# Altium PCB ICAN-7006-USB.PcbDoc
Units mm, origin at the board's own origin, x right, y up, seen from the top; angles counter-clockwise.
Board outline 150 x 80 mm, 2 copper layers (Top Layer, Bottom Layer); 99 components, 160 nets, 498 pads, 0 vias.
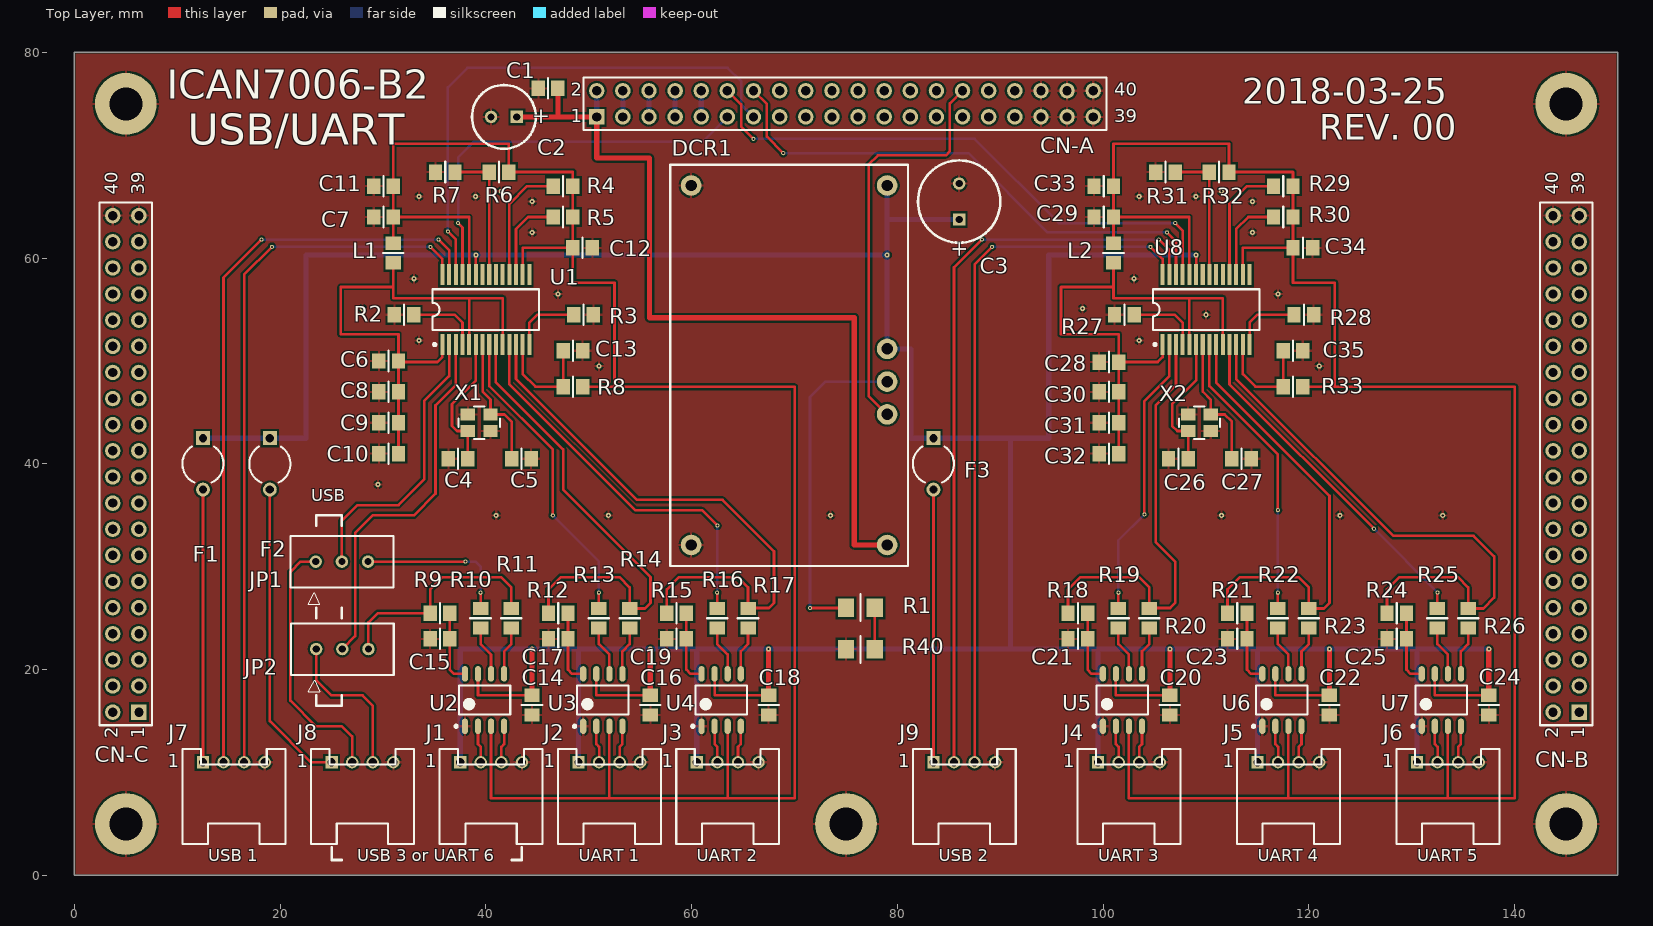
[diagram p0: Top Layer view]
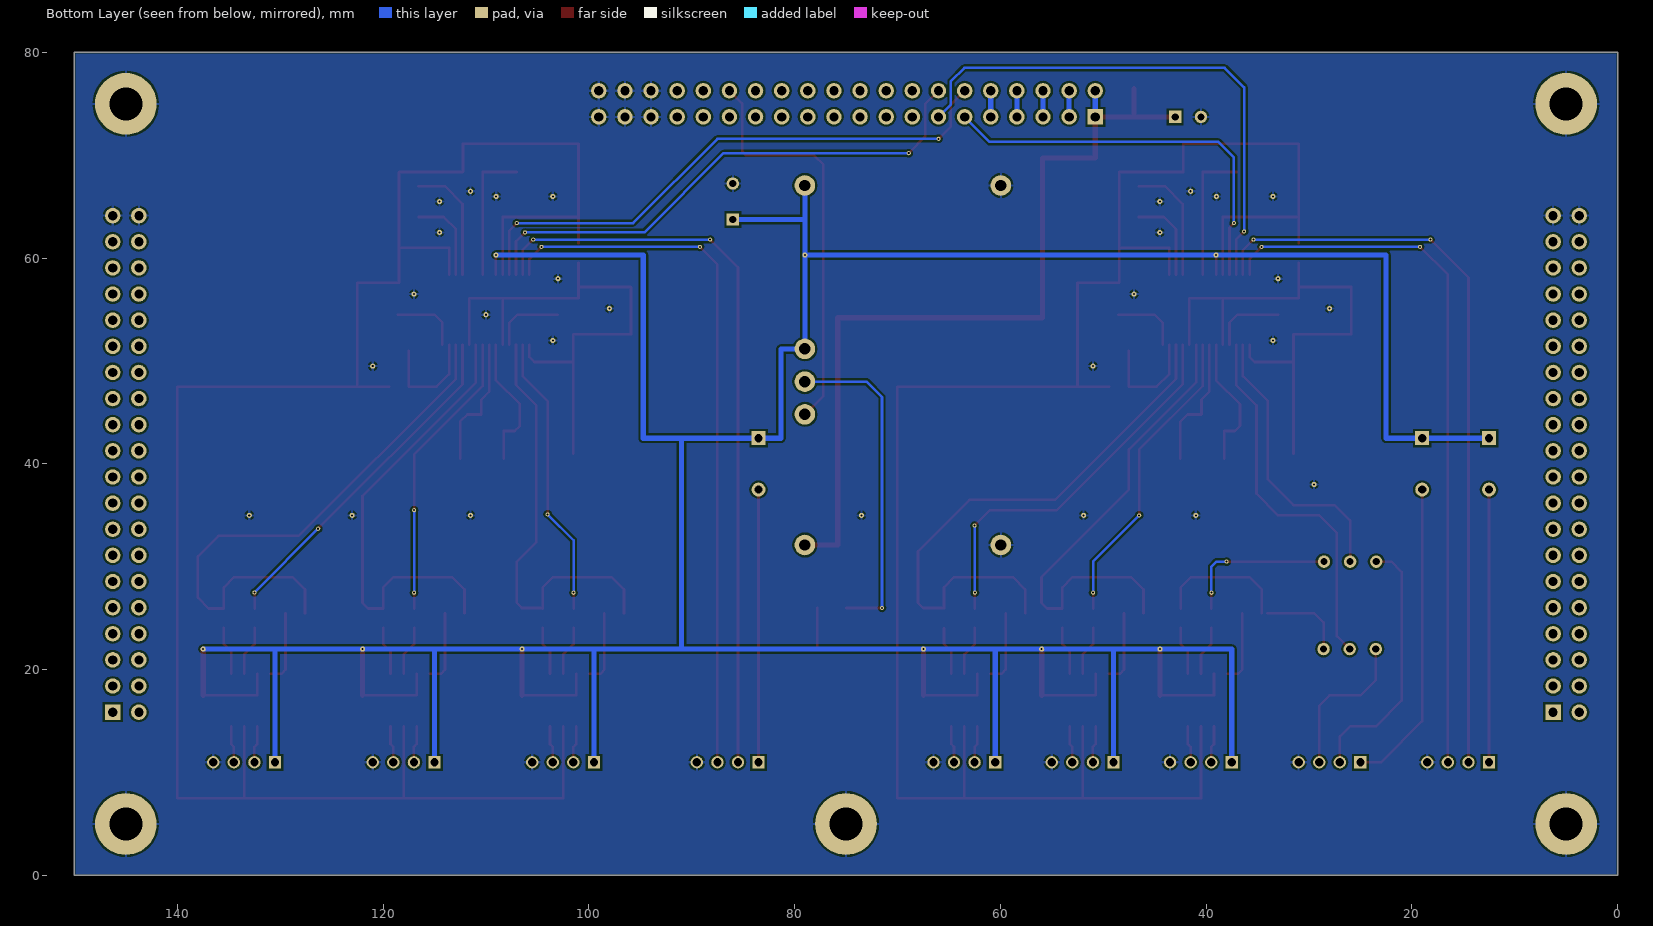
[diagram p1: Bottom Layer view, seen from below]

## Layer stack, top to bottom
Top Layer: signal copper 0.0356
Dielectric: dielectric 0.32, FR-4, Dk 4.8
Bottom Layer: signal copper 0.0356

## Board outline
0,0 0,80 150,80 150,0

## Design rules (kind name [scope] priority, off if disabled: settings)
Clearance [All] p1: gap=0.2
ComponentClearance [All] p1: gap=0.254 collisioncheckmode=3 verticalgap=0.254
HoleSize [All] p1: absolutevalues=TRUE maxlimit=8 minlimit=0.025 maxpercent=80.000 minpercent=20.000
PolygonConnect [All] p1: connectstyle=Relief reliefconductorwidth=0.254 reliefentries=4 polygonreliefangle="90 Angle"
RoutingVias [All] p1: holewidth=0.2 width=0.4 viastyle="Through Hole" minholewidth=0.2 minwidth=0.4 maxholewidth=4 maxwidth=8
SolderMaskExpansion [All] p1: expansion=0.102
TestPointUsage [All] p1: valid=0 allowmultiple=FALSE
Testpoint [All] p1: side=15 testpointundercomponent=TRUE minsize=1.016 maxsize=2.54 preferedsize=1.524 minholesize=0 maxholesize=1.016 preferedholesize=0.813 testpointgrid=0.025 style=1023 order=0123456789
Width [All] p1: maxlimit=2 minlimit=0.2 preferedwidth=0.254
17 further rules are at their usual default settings.

## Components (designator, comment, footprint, x,y, rotation, side; value= is the part's Value field where it differs from the comment)
C1 "100nF" [0805]2012 46.05,76.5 r0 top
C2 "47uF/25V" "Capa MH5 PITCH2.5mm" 41.75,73.73 r180 top
C3 "330uF/16V" "CAPA WXA PITCH 3.5mm" 86,65.5 r90 top
C4 "33pF" [0805]2012 37.3,40.5 r0 top
C5 "33pF" [0805]2012 43.45,40.5 r180 top
C6 "0.1uF" [0805]2012 30.55,50 r0 top
C7 "10uF/10V" [0805]2012 30.05,64 r180 top
C8 "1uF" [0805]2012 30.55,47 r0 top
C9 "33pF" [0805]2012 30.55,44 r0 top
C10 "33pF" [0805]2012 30.55,41 r0 top
C11 "0.1uF" [0805]2012 30.05,67 r0 top
C12 "10uF" [0805]2012 49.4,61 r180 top
C13 "1uF" [0805]2012 48.45,51 r180 top
C14 "0.1uF" [0805]2012 44.48,16.55 r270 top
C15 "0.1uF" [0805]2012 35.53,23 r180 top
C16 "0.1uF" [0805]2012 55.98,16.55 r270 top
C17 "0.1uF" [0805]2012 47.03,23 r180 top
C18 "0.1uF" [0805]2012 67.48,16.55 r270 top
C19 "0.1uF" [0805]2012 58.53,23 r180 top
C20 "0.1uF" [0805]2012 106.48,16.55 r270 top
C21 "0.1uF" [0805]2012 97.53,23 r180 top
C22 "0.1uF" [0805]2012 121.98,16.55 r270 top
C23 "0.1uF" [0805]2012 113.03,23 r180 top
C24 "0.1uF" [0805]2012 137.48,16.55 r270 top
C25 "0.1uF" [0805]2012 128.53,23 r180 top
C26 "33pF" [0805]2012 107.3,40.5 r0 top
C27 "33pF" [0805]2012 113.45,40.5 r180 top
C28 "0.1uF" [0805]2012 100.55,49.9 r0 top
C29 "10uF/10V" [0805]2012 100.05,64 r180 top
C30 "1uF" [0805]2012 100.55,47 r0 top
C31 "33pF" [0805]2012 100.55,44 r0 top
C32 "33pF" [0805]2012 100.55,41 r0 top
C33 "0.1uF" [0805]2012 100.05,67 r0 top
C34 "10uF" [0805]2012 119.4,61 r180 top
C35 "1uF" [0805]2012 118.45,51 r180 top
CN-A "25-1201-220" HDR2X20 50.77,73.73 r0 top locked
CN-B "25-1201-220" HDR2X20 146.27,15.87 r90 top locked
CN-C "25-1201-220" HDR2X20 6.27,15.87 r90 top locked
DCR1 "PTN78020W" PTN78020 59.95,32.12 r90 top
F1 "72V/300mA" CAPR5-4X5 12.5,40 r270 top
F2 "72V/300mA" CAPR5-4X5 19,40 r270 top
F3 "72V/300mA" CAPR5-4X5 83.5,40 r270 top
J1 "HY 4P" HY-4AW 40.5,11 r0 top
J2 "HY 4P" HY-4AW 52,11 r0 top
J3 "HY 4P" HY-4AW 63.5,11 r0 top
J4 "HY 4P" HY-4AW 102.5,11 r0 top
J5 "HY 4P" HY-4AW 118,11 r0 top
J6 "HY 4P" HY-4AW 133.5,11 r0 top
J7 "HY 4P" HY-4AW 15.5,11 r0 top
J8 "HY 4P" HY-4AW 28,11 r0 top
J9 "HY 4P" HY-4AW 86.5,11 r0 top
JP1 "SW Jumper" VR 26,30.5 r90 top
JP2 "SW Jumper" VR 26.04,22 r90 top
L1 "2.2uH/500mA" [0805]2012 31,60.5 r90 top
L2 "2.2uH/500mA" [0805]2012 101,60.5 r90 top
R1 "20k,1/4W" [1206]3216 76.4,26 r180 top
R2 "680,1/8W" [0805]2012 32.05,54.5 r0 top
R3 "10k,1/8W" [0805]2012 49.5,54.5 r180 top
R4 "100k,1/8W" [0805]2012 47.5,67 r180 top
R5 "4.7k,1/8W" [0805]2012 47.5,64 r180 top
R6 "10k,1/8W" [0805]2012 41.275,68.369 r0 top
R7 "47k,1/8W" [0805]2012 36.05,68.369 r0 top
R8 "10k,1/8W" [0805]2012 48.45,47.5 r0 top
R9 "1.5k,1/8W" [0805]2012 35.53,25.5 r0 top
R10 "33,1/8W" [0805]2012 39.48,25 r270 top
R11 "33,1/8W" [0805]2012 42.48,25 r270 top
R12 "1.5k,1/8W" [0805]2012 47.03,25.5 r0 top
R13 "33,1/8W" [0805]2012 50.98,25 r270 top
R14 "33,1/8W" [0805]2012 53.98,25 r270 top
R15 "1.5k,1/8W" [0805]2012 58.53,25.5 r0 top
R16 "33,1/8W" [0805]2012 62.48,25 r270 top
R17 "33,1/8W" [0805]2012 65.48,25 r270 top
R18 "1.5k,1/8W" [0805]2012 97.53,25.5 r0 top
R19 "33,1/8W" [0805]2012 101.48,25 r270 top
R20 "33,1/8W" [0805]2012 104.48,25 r270 top
R21 "1.5k,1/8W" [0805]2012 113.03,25.5 r0 top
R22 "33,1/8W" [0805]2012 116.98,25 r270 top
R23 "33,1/8W" [0805]2012 119.98,25 r270 top
R24 "1.5k,1/8W" [0805]2012 128.53,25.5 r0 top
R25 "33,1/8W" [0805]2012 132.48,25 r270 top
R26 "33,1/8W" [0805]2012 135.48,25 r270 top
R27 "680,1/8W" [0805]2012 102.05,54.5 r0 top
R28 "10k,1/8W" [0805]2012 119.5,54.5 r180 top
R29 "100k,1/8W" [0805]2012 117.5,67 r180 top
R30 "4.7k,1/8W" [0805]2012 117.5,64 r180 top
R31 "47k,1/8W" [0805]2012 106.05,68.369 r0 top
R32 "10k,1/8W" [0805]2012 111.275,68.369 r0 top
R33 "10k,1/8W" [0805]2012 118.45,47.5 r0 top
R40 "1k,1/4W" [1206]3216 76.4,22 r0 top
U1 "GL850G-SSOP28" SSOP-28 40,55 r0 top
U2 "PL2303SA" SOIC150-8_L 39.865,17.05 r90 top
U3 "PL2303SA" SOIC150-8_L 51.365,17.05 r90 top
U4 "PL2303SA" SOIC150-8_L 62.865,17.05 r90 top
U5 "PL2303SA" SOIC150-8_L 101.865,17.05 r90 top
U6 "PL2303SA" SOIC150-8_L 117.365,17.05 r90 top
U7 "PL2303SA" SOIC150-8_L 132.865,17.05 r90 top
U8 "GL850G-SSOP28" SSOP-28 110,55 r0 top
X1 "TSX3225" "XTAL 3225" 39.35,44 r0 top
X2 "TSX3225" "XTAL 3225" 109.35,44 r0 top

## Footprints (in the part's own frame and the unit in brackets; to place one, negate y for a bottom-side part, rotate by r counter-clockwise, add the part's x,y. Pads: shape width x height; smd on the part's side, far side on the other; paste and mask are expansions set on the pad)
[0805]2012 [mm] "SMD 2.0x1.25"
  rect 1.3x1.5 smd: 1(-0.95,0) 2(0.95,0)
  silkscreen extent 0,-1 0,1
[1206]3216 [mm] "SMD 3.2x1.6"
  rect 1.6x1.8 smd: 1(-1.4,0) 2(1.4,0)
  silkscreen extent 0,-1.35 0,1.25
"Capa MH5 PITCH2.5mm" [mm] "Capacitor, Electrolytic, Radial; Body 6.3 mm (Dia.xH typ); Pin Spacing 2.5 mm (typ)"
  rect 1.2x1.2 hole 0.7: 1(-1.25,0)
  round 1.2 hole 0.7: 2(1.25,0)
  silkscreen extent -3.1,-3.1 3.1,3.1
"CAPA WXA PITCH 3.5mm" [mm] "Capacitor, Electrolytic, Radial; Body 8 mm (Dia); Pin Spacing 3.5 mm (typ)"
  rect 1.2x1.2 hole 0.7: 1(-1.75,0)
  round 1.2 hole 0.7: 2(1.75,0)
  silkscreen extent -4,-4 4,4
CAPR5-4X5 [mm] "Capacitor; 2 Leads"
  rect 1.35x1.35 hole 0.8: 1(-2.5,0)
  round 1.35 hole 0.8: 2(2.5,0)
  silkscreen extent -1.69,-2 1.82,2
HDR2X20 [mm] "Connector; Header; 20x2 Position"
  rect 1.5x1.5 hole 0.9: 1(0,0)
  round 1.5 hole 0.9: 2(0,2.54) 3(2.54,0) 4(2.54,2.54) 5(5.08,0) 6(5.08,2.54) 7(7.62,0) 8(7.62,2.54) 9(10.16,0) 10(10.16,2.54) 11(12.7,0) 12(12.7,2.54) 13(15.24,0) 14(15.24,2.54) 15(17.78,0) 16(17.78,2.54) 17(20.32,0) 18(20.32,2.54) 19(22.86,0) 20(22.86,2.54) 21(25.4,0) 22(25.4,2.54) 23(27.94,0) 24(27.94,2.54) 25(30.48,0) 26(30.48,2.54) 27(33.02,0) 28(33.02,2.54) 29(35.56,0) 30(35.56,2.54) 31(38.1,0) 32(38.1,2.54) 33(40.64,0) 34(40.64,2.54) 35(43.18,0) 36(43.18,2.54) 37(45.72,0) 38(45.72,2.54) 39(48.26,0) 40(48.26,2.54)
  silkscreen extent -1.27,-1.27 49.53,3.81
HY-4AW [mm] "YOLINK PHB CONNECTOR A2006-xxA 2.00mm"
  rect 1.2x1.2 hole 0.8: 1(-3,0)
  round 1.2 hole 0.8: 2(-1,0) 3(1,0) 4(3,0)
  silkscreen extent -5,-7.95 5,1.3
PTN78020 [mm] "REGURATOR Ti PTN78020W"
  round 2 hole 1.1: 1(0,0) 2(0,-19.05) 3(12.7,-19.05) 4(15.88,-19.05) 5(19.06,-19.05) 6(34.94,-19.05) 7(34.94,0)
  silkscreen extent -2.03,-21.08 36.96,2.03
SOIC150-8_L [mm] "8-Pin Plastic Narrow Body Small Outline Integrated Circuit 1.27 mm Pitch, IPC High Density"
  oval 1.5x0.6 smd: 1(-2.55,1.905) 2(-2.55,0.635) 3(-2.55,-0.635) 4(-2.55,-1.905) 5(2.55,-1.905) 6(2.55,-0.635) 7(2.55,0.635) 8(2.55,1.905)
  silkscreen extent -2.67,-2.5 1.4,2.88, body extent -2,-2.5 2,2.5, height 1.76
SSOP-28 [mm] "SSOP, Plastic; 28 Leads; Body Width 5.2 mm; Pitch 0.65 mm"
  rect 0.4x2.05 smd: 1(-4.225,-3.4) 2(-3.575,-3.4) 3(-2.925,-3.4) 4(-2.275,-3.4) 5(-1.625,-3.4) 6(-0.975,-3.4) 7(-0.325,-3.4) 8(0.325,-3.4) 9(0.975,-3.4) 10(1.625,-3.4) 11(2.275,-3.4) 12(2.925,-3.4) 13(3.575,-3.4) 14(4.225,-3.4) 15(4.225,3.4) 16(3.575,3.4) 17(2.925,3.4) 18(2.275,3.4) 19(1.625,3.4) 20(0.975,3.4) 21(0.325,3.4) 22(-0.325,3.4) 23(-0.975,3.4) 24(-1.625,3.4) 25(-2.275,3.4) 26(-2.925,3.4) 27(-3.575,3.4) 28(-4.225,3.4)
  silkscreen extent -5.18,-3.52 5.17,1.98
VR [mm] "VR Trim"
  round 1.2 hole 0.7: 1(0,2.54) 2(0,0) 3(0,-2.54)
  silkscreen extent -4.15,-5 2.5,5
"XTAL 3225" [mm]
  rect 1.4x1.15 smd: 1(-1.1,-0.8) 2(1.1,-0.8) 3(1.1,0.8) 4(-1.1,0.8)
  silkscreen extent -2,-1.6 2,1.6

## Part data
C1: library part Cap, "Capacitor"
C2 C3: library part "Cap Pol2", "Polarized Capacitor (Axial)"
C4 C5 C6 C8 C9 C10 C11 C12 C13 C14 C15 C16 C17 C18 C19 C20 C21 C22 C23 C24 C25 C26 C27 C28 C30 C31 C32 C33 C34 C35: library part "Cap Semi", "Capacitor (Semiconductor SIM Model)"
C7 C29: library part "Cap Pol3", "Polarized Capacitor (Surface Mount)"
CN-A CN-B: library part "Header 25X2", "Header, 25-Pin, Dual row"
CN-C: library part "Header 20X2", "Header, 20-Pin, Dual row"
DCR1: library part PTN78020
F1 F2 F3: library part "Fuse 1", "Fuse"
J1 J2 J3 J4 J5 J6 J7 J8 J9: library part "Header 4", "Header, 4-Pin"
L1 L2: library part Inductor, "Inductor"
R1 R2 R3 R4 R5 R6 R7 R8 R9 R10 R11 R12 R13 R14 R15 R16 R17 R18 R19 R20 R21 R22 R23 R24 R25 R26 R27 R28 R29 R30 R31 R32 R33 R40: library part Res1, "Resistor"
U1 U7 U8: library part IC28
U2: library part "IC48 QFP"
U3 U4 U5 U6: library part IC8-WIDE
X1 X2: library part "IC4 WIDE"

## Free pads (board coordinates)
  round 6 hole 3.2: 0(5,5) 0(5,75) 0(75,5) 0(145,5) 0(145,75)
  round 0.4 hole 0.2: 0(18.2,61.8) 0(19.2,61.1) 0(34.6,61.1) 0(35.4,61.8) 0(36.3,62.6) 0(37.3,63.4) 0(38,30.5) 0(39.48,27.48) 0(46.5,35) 0(50.98,27.48) 0(62.48,27.48) 0(62.5,34) 0(66,71.6) 0(68.9,70.2) 0(71.5,26) 0(88.2,61.8) 0(89.2,61.1) 0(101.48,27.48) 0(104,35.1) 0(104.6,61.1) 0(105.4,61.8) 0(106.2,62.5) 0(107,63.4) 0(116.98,27.48) 0(116.98,35.5) 0(126.3,33.7) 0(132.5,27.5)
  round 0.5 hole 0.2: 0(28,55.1) 0(29.5,38) 0(33,58) 0(33.5,52) 0(33.5,66) 0(39,66) 0(39.025,60.3) 0(41,35) 0(41.5,66.5) 0(44.48,22) 0(44.5,62.5) 0(44.5,65.5) 0(47,56.5) 0(51,49.5) 0(51.9,35) 0(55.98,22) 0(67.48,22) 0(73.5,35) 0(79,60.3) 0(98,55.1) 0(103,58) 0(103.5,52) 0(103.5,66) 0(106.48,22) 0(109,66) 0(109.025,60.3) 0(110,54.5) 0(111.5,35) 0(111.5,66.5) 0(114.5,62.5) 0(114.5,65.5) 0(117,56.5) 0(121,49.5) 0(121.98,22) 0(123,35) 0(133,35) 0(137.48,22)

## Nets (pads, with @x,y where several pads share a name; then routed paths per layer and width w, separated by ;. In a path a pad name is that pad's centre, name@x,y a point inside that pad or via, vN(x,y) a via of type N, cw(c..) or ccw(c..) an arc to the next point about the centre after c; other vN are vias at no path point)
*LIGHT_ON: CN-A.33
*MF-DIR: CN-B.3
*MF-ENB: CN-B.5
*ML-ALM: CN-C.8
*ML-BRAKE: CN-B.10
*ML-ENB: CN-B.12
*ML-F/*R: CN-B.8
*ML-PG: CN-C.6
*MLL-PG_B: CN-C.12
*MLL-PG_F: CN-C.10
*MLR-PG_B: CN-C.11
*MLR-PG_F: CN-C.9
*MOTOR_ON1: CN-A.29
*MOTOR_ON2: CN-A.31
*MR-ALM: CN-C.7
*MR-BRAKE: CN-B.9
*MR-ENB: CN-B.11
*MR-F/*R: CN-B.7
*MR-PG: CN-C.5
*SNS-COVER: CN-C.19
*SNS-HOME_C: CN-C.3
*SNS-HOME_L: CN-C.2
*SNS-HOME_R: CN-C.1
*SNS-MIC_CLOSE: CN-C.4
*SNS-RAIN: CN-C.30
*SW-A/*M: CN-C.28
*SW-BRAKE: CN-C.27
*SW-EMERGENCY: CN-A.25
*SW-LUG-B_OR: CN-C.24
*SW-LUG-B_POS: CN-C.22
*SW-LUG-CENTER: CN-C.20
*SW-LUG-F_OR: CN-C.23
*SW-LUG-F_POS: CN-C.21
*SW-LUG_DN: CN-C.34
*SW-LUG_UP: CN-C.32
*SW-MLL_CLOSE: CN-C.16
*SW-MLL_OPEN: CN-C.18
*SW-MLR_CLOSE: CN-C.15
*SW-MLR_OPEN: CN-C.17
*SW-SEAT: CN-C.29
*SW_CLOSE: CN-C.26
*SW_FORWORD: CN-C.31
*SW_OPEN: CN-C.25
AD-48V: CN-C.13
AD-ACC: CN-C.14
AD-TEMP: CN-C.33
DC3.3V: CN-A.7 CN-A.8 | length 2.5
  Bottom Layer w0.5: CN-A.7 CN-A.8
DC5V: CN-A.5 CN-A.6 | length 2.5
  Bottom Layer w0.5: CN-A.5 CN-A.6
DC5VB: C3.1 C14.1 C16.1 C18.1 C20.1 C22.1 C24.1 DCR1.5 DCR1.6 F1.1 F2.1 F3.1 J1.1 J2.1 J3.1 J4.1 J5.1 J6.1 pad.0@39.025,60.3 pad.0@44.48,22 pad.0@55.98,22 pad.0@67.48,22 pad.0@79,60.3 pad.0@106.48,22 pad.0@109.025,60.3 pad.0@121.98,22 pad.0@137.48,22 U1.23 U2.7 U3.7 U4.7 U5.7 U6.7 U7.7 U8.23 | length 425.1
  Top Layer w0.254: U1.23 pad.0@39.025,60.3 ; U2.7 39.23,17.5 C14.1 ; U3.7 50.73,17.5 C16.1 ; U4.7 62.23,17.5 C18.1 ; U5.7 101.23,17.5 C20.1 ; U8.23 pad.0@109.025,60.3 ; U6.7 116.73,17.5 C22.1 ; U7.7 132.23,17.5 C24.1
  Top Layer w0.5: C14.1 pad.0@44.48,22 ; C16.1 pad.0@55.98,22 ; C18.1 pad.0@67.48,22 ; C20.1 pad.0@106.48,22 ; C22.1 pad.0@121.98,22 ; C24.1 pad.0@137.48,22
  Bottom Layer w0.5: F1.1 22.5,42.5 22.5,60.3 pad.0@79,60.3 ; J1.1 37.5,22 pad.0@137.48,22 ; J2.1 49,22 ; J3.1 60.5,22 ; 79,63.75 C3.1 ; DCR1.6 DCR1.5 81.32,51.18 81.32,42.5 94.7,42.5 94.7,60.3 pad.0@109.025,60.3 ; 91,22 91,42.5 ; J4.1 99.5,22 ; J5.1 115,22 ; J6.1 130.5,22
DC12V: CN-A.3 CN-A.4 | length 2.5
  Bottom Layer w0.5: CN-A.3 CN-A.4
DC24V: C1.2 C2.1 CN-A.1 CN-A.2 DCR1.2 | length 82.9
  Top Layer w0.5: C2.1 CN-A.1 50.77,69.73 55.9,69.73 55.9,54.2 75.8,54.2 75.8,32.12 DCR1.2 ; 47,73.73 C1.2
  Bottom Layer w0.5: CN-A.1 CN-A.2
DM11: J7.2 pad.0@18.2,61.8 pad.0@35.4,61.8 U1.27 | length 73.4
  Top Layer w0.254: J7.2 14.5,58.1 pad.0@18.2,61.8 ; pad.0@35.4,61.8 36.425,60.775 U1.27
  Bottom Layer w0.254: pad.0@18.2,61.8 pad.0@35.4,61.8
DM12: JP1.2 U1.2 | length 27.8
  Top Layer w0.254: JP1.2 26,34.5 27.5,36 31.5,36 34,38.5 34,46.1 36.425,48.525 U1.2
DM12-1: J8.2 JP1.1 | length 25.3
  Top Layer w0.254: JP1.1 22,30.5 21,29.5 21,17 23.5,14.5 26,14.5 27,13.5 J8.2
DM12-2: JP1.3 pad.0@38,30.5 pad.0@39.48,27.48 R10.1 | length 15.2
  Top Layer w0.254: JP1.3 pad.0@38,30.5 ; R10.1 pad.0@39.48,27.48
  Bottom Layer w0.254: pad.0@38,30.5 39,30.5 39.48,30.02 pad.0@39.48,27.48
DM13: pad.0@46.5,35 pad.0@50.98,27.48 R13.1 U1.8 | length 30.1
  Top Layer w0.254: U1.8 40.325,47.575 46.5,41.4 pad.0@46.5,35 ; R13.1 pad.0@50.98,27.48
  Bottom Layer w0.254: pad.0@46.5,35 50.98,30.52 pad.0@50.98,27.48
DM14: pad.0@62.5,34 pad.0@62.48,27.48 R16.1 U1.11 | length 39.9
  Top Layer w0.254: U1.11 42.275,47.725 54.5,35.5 61,35.5 pad.0@62.5,34 ; R16.1 pad.0@62.48,27.48
  Bottom Layer w0.254: pad.0@62.48,27.48 62.48,29.52 ; pad.0@62.5,27.48 pad.0@62.5,34
DM21: J9.2 pad.0@88.2,61.8 pad.0@105.4,61.8 U8.27 | length 72.9
  Top Layer w0.254: J9.2 85.5,59.1 pad.0@88.2,61.8 ; pad.0@105.4,61.8 106.425,60.775 U8.27
  Bottom Layer w0.254: pad.0@88.2,61.8 pad.0@105.4,61.8
DM22: pad.0@101.48,27.48 pad.0@104,35.1 R19.1 U8.2 | length 27.7
  Top Layer w0.254: R19.1 pad.0@101.48,27.48 ; pad.0@104,35.1 104,46.1 106.425,48.525 U8.2
  Bottom Layer w0.254: pad.0@101.48,27.48 101.48,32.58 pad.0@104,35.1
DM23: pad.0@116.98,27.48 pad.0@116.98,35.5 R22.1 U8.8 | length 28.4
  Top Layer w0.254: U8.8 110.325,47.575 116.98,40.92 pad.0@116.98,35.5 ; R22.1 pad.0@116.98,27.48
  Bottom Layer w0.254: pad.0@116.98,27.48 pad.0@116.98,35.5
DM24: pad.0@126.3,33.7 pad.0@132.5,27.5 R25.1 U8.11 | length 34
  Top Layer w0.254: U8.11 112.275,47.725 pad.0@126.3,33.7 ; R25.1 pad.0@132.48,27.48
  Bottom Layer w0.254: pad.0@126.3,33.7 pad.0@132.5,27.5
DP11: J7.3 pad.0@19.2,61.1 pad.0@34.6,61.1 U1.28 | length 69.8
  Top Layer w0.254: J7.3 16.5,58.4 pad.0@19.2,61.1 ; pad.0@34.6,61.1 35.775,59.925 U1.28
  Bottom Layer w0.254: pad.0@19.2,61.1 pad.0@34.6,61.1
DP12: JP2.2 U1.3 | length 36.5
  Top Layer w0.254: JP2.2 27.3,23.26 27.3,33.3 29,35 33,35 35.1,37.1 35.1,45.7 37.075,47.675 U1.3
DP12-1: J8.3 JP2.1 | length 15
  Top Layer w0.254: JP2.1 23.5,19 25,17.5 28,17.5 29,16.5 J8.3
DP12-2: JP2.3 R9.1 R11.1 | length 21.6
  Top Layer w0.254: JP2.3 28.58,24.58 29.5,25.5 R9.1@34.072,25.5 ; R9.1 34.58,27.8 35.78,29 41.48,29 42.48,28 R11.1
DP13: R12.1 R14.1 U1.9 | length 46.7
  Top Layer w0.254: U1.9 40.975,47.925 47.5,41.4 47.5,37.5 56,29 56,26.5 55.45,25.95 R14.1 53.98,28 52.98,29 47.28,29 46.08,27.8 R12.1
DP14: R15.1 R17.1 U1.12 | length 56.2
  Top Layer w0.254: U1.12 42.925,48.275 54.7,36.5 63,36.5 68,31.5 68,26.5 67.5,26 R17.1@65.48,26 ; R15.1 57.58,27.8 58.78,29 64.48,29 65.48,28 R17.1
DP21: J9.3 pad.0@89.2,61.1 pad.0@104.6,61.1 U8.28 | length 69.4
  Top Layer w0.254: J9.3 87.5,59.4 pad.0@89.2,61.1 ; pad.0@104.6,61.1 105.775,59.925 U8.28
  Bottom Layer w0.254: pad.0@89.2,61.1 pad.0@104.6,61.1
DP22: R18.1 R20.1 U8.3 | length 42.6
  Top Layer w0.254: R18.1 96.58,27.8 97.78,29 103.48,29 104.48,28 R20.1 ; R20.1@104.48,26 106.5,26 107,26.5 107,30.5 105.1,32.4 105.1,45.7 107.075,47.675 U8.3
DP23: R21.1 R23.1 U8.9 | length 45.1
  Top Layer w0.254: U8.9 110.975,47.925 122,36.9 122,26.5 121.45,25.95 R23.1 119.98,28 118.98,29 113.28,29 112.08,27.8 R21.1
DP24: R24.1 R26.1 U8.12 | length 55.7
  Top Layer w0.254: U8.12 112.925,48.275 128.2,33 136,33 138,31 138,27 136.95,25.95 R26.1 135.48,28 134.48,29 128.78,29 127.58,27.8 R24.1
GND: C1.1 C2.2 C3.2 C4.1 C5.1 C6.1 C7.2 C8.1 C9.1 C10.1 C11.1 C12.1 C13.1 C14.2 C15.2 C16.2 C17.2 C18.2 C19.2 C20.2 C21.2 C22.2 C23.2 C24.2 C25.2 C26.1 C27.1 C28.1 C29.2 C30.1 C31.1 C32.1 C33.1 C34.1 C35.1 CN-A.35 CN-A.36 CN-A.37 CN-A.38 CN-A.39 CN-A.40 CN-B.39 CN-B.40 CN-C.39 CN-C.40 DCR1.1 DCR1.7 J1.4 J2.4 J3.4 J4.4 J5.4 J6.4 J7.4 J8.4 J9.4 pad.0@5,5 pad.0@5,75 pad.0@28,55.1 pad.0@29.5,38 pad.0@33,58 pad.0@33.5,52 pad.0@33.5,66 pad.0@39,66 pad.0@41,35 pad.0@41.5,66.5 pad.0@44.5,62.5 pad.0@44.5,65.5 pad.0@47,56.5 pad.0@51,49.5 pad.0@51.9,35 pad.0@73.5,35 pad.0@75,5 pad.0@98,55.1 pad.0@103,58 pad.0@103.5,52 pad.0@103.5,66 pad.0@109,66 pad.0@110,54.5 pad.0@111.5,35 pad.0@111.5,66.5 pad.0@114.5,62.5 pad.0@114.5,65.5 pad.0@117,56.5 pad.0@121,49.5 pad.0@123,35 pad.0@133,35 pad.0@145,5 pad.0@145,75 R2.1 R3.1 R7.1 R27.1 R28.1 R31.1 R40.1 U2.1 U3.1 U4.1 U5.1 U6.1 U7.1 X1.2 X1.4 X2.2 X2.4
HUB_33V1: C7.1 C11.2 C12.2 L1.2 R4.1 R5.1 R6.2 R8.2 U1.16 U1.24 U2.3 U3.3 U4.3 | length 186.3
  Top Layer w0.254: L1.2 31,71.1 42.225,71.1 R6.2 48.45,68.369 48.45,57.6 52.5,57.6 52.5,47.5 ; C7.1 38.375,64 U1.24 ; U2.3 40.5,7.5 70,7.5 70,47.5 R8.2 ; U1.16 43.575,61 C12.2 ; 52,7.5 U3.3 ; 63.5,7.5 U4.3
HUB_33V2: C29.1 C33.2 C34.2 L2.2 R29.1 R30.1 R32.2 R33.2 U5.3 U6.3 U7.3 U8.16 U8.24 | length 194.3
  Top Layer w0.254: L2.2 101,71.1 112.225,71.1 R32.2 118.45,68.369 118.45,57.6 122.5,57.6 122.5,47.5 ; C29.1 108.375,64 U8.24 ; U5.3 102.5,7.5 140,7.5 140,47.5 R33.2 ; U8.16 113.575,61 C34.2 ; 118,7.5 U6.3 ; 133.5,7.5 U7.3
I2C_SCL: CN-A.18
I2C_SCL2: CN-A.20
I2C_SDA: CN-A.17
I2C_SDA2: CN-A.19
LUG-BRAKE: CN-B.23
LUG-PWM1: CN-B.19
LUG-PWM2: CN-B.21
MF-PWM: CN-B.1
MIC-MOTOR: CN-B.25
ML-PWM: CN-B.14
MLL-PWM1: CN-B.16
MLL-PWM2: CN-B.18
MLR-PWM1: CN-B.15
MLR-PWM2: CN-B.17
MR-PWM: CN-B.13
NetC4_2: C4.2 U1.6 X1.1 | length 13.3
  Top Layer w0.254: C4.2 X1.1 37.2,43.2 36.7,43.7 36.7,45.8 39.025,48.125 U1.6
NetC5_2: C5.2 U1.7 X1.3 | length 13.1
  Top Layer w0.254: U1.7 39.675,47.025 40.45,46.25 X1.3 41.8,44.8 42.5,44.1 C5.2
NetC6_2: C6.2 C8.2 C9.2 C10.2 L1.1 U1.1 U1.5 U1.10 | length 55.6
  Top Layer w0.254: 31,57.2 25.9,57.2 25.9,52.6 31.5,52.6 C10.2 ; L1.1 31,56.1 41.625,56.1 U1.10 ; C6.2@31.5,49.9 35.3,49.9 35.775,50.375 U1.1 ; U1.5 38.375,56.075
NetC13_2: C13.2 R8.1 U1.13 | length 10.8
  Top Layer w0.254: U1.13 43.575,48.725 44.8,47.5 R8.1 C13.2
NetC15_1: C15.1 R9.2 U2.8 | length 7.1
  Top Layer w0.254: R9.2 36.48,20 36.88,19.6 U2.8
NetC17_1: C17.1 R12.2 U3.8 | length 7.1
  Top Layer w0.254: R12.2 47.98,20 48.38,19.6 U3.8
NetC19_1: C19.1 R15.2 U4.8 | length 7.1
  Top Layer w0.254: R15.2 59.48,20 59.88,19.6 U4.8
NetC21_1: C21.1 R18.2 U5.8 | length 7.1
  Top Layer w0.254: R18.2 98.48,20 98.88,19.6 U5.8
NetC23_1: C23.1 R21.2 U6.8 | length 7.1
  Top Layer w0.254: R21.2 113.98,20 114.38,19.6 U6.8
NetC25_1: C25.1 R24.2 U7.8 | length 7.1
  Top Layer w0.254: R24.2 129.48,20 129.88,19.6 U7.8
NetC26_2: C26.2 U8.6 X2.1 | length 13.3
  Top Layer w0.254: C26.2 X2.1 107.2,43.2 106.7,43.7 106.7,45.8 109.025,48.125 U8.6
NetC27_2: C27.2 U8.7 X2.3 | length 13.1
  Top Layer w0.254: U8.7 109.675,47.025 110.45,46.25 X2.3 111.8,44.8 112.5,44.1 C27.2
NetC28_2: C28.2 C30.2 C31.2 C32.2 L2.1 U8.1 U8.5 U8.10 | length 55.6
  Top Layer w0.254: 101,57.2 95.9,57.2 95.9,52.6 101.5,52.6 C32.2 ; L2.1 101,56.1 111.625,56.1 U8.10 ; C28.2 105.3,49.9 105.775,50.375 U8.1 ; U8.5 108.375,56.075
NetC35_2: C35.2 R33.1 U8.13 | length 10.8
  Top Layer w0.254: U8.13 113.575,48.725 114.8,47.5 R33.1 C35.2
NetDCR1_4: DCR1.4 pad.0@71.5,26 R1.2 | length 32.1
  Top Layer w0.254: pad.0@71.5,26 R1.2
  Bottom Layer w0.254: pad.0@71.5,26 71.5,46.5 73,48 DCR1.4
NetF1_2: F1.2 J7.1 | length 26.5
  Top Layer w0.254: J7.1 F1.2
NetF2_2: F2.2 J8.1 | length 30.2
  Top Layer w0.254: F2.2 19,15 23,11 J8.1
NetF3_2: F3.2 J9.1 | length 26.5
  Top Layer w0.254: J9.1 F3.2
NetJ1_2: J1.2 U2.2 | length 3.6
  Top Layer w0.254: U2.2 39.23,12.77 39.5,12.5 J1.2
NetJ1_3: J1.3 U2.4 | length 3.6
  Top Layer w0.254: J1.3 41.5,12.5 41.77,12.77 U2.4
NetJ2_2: J2.2 U3.2 | length 3.6
  Top Layer w0.254: U3.2 50.73,12.77 51,12.5 J2.2
NetJ2_3: J2.3 U3.4 | length 3.6
  Top Layer w0.254: J2.3 53,12.5 53.27,12.77 U3.4
NetJ3_2: J3.2 U4.2 | length 3.6
  Top Layer w0.254: U4.2 62.23,12.77 62.5,12.5 J3.2
NetJ3_3: J3.3 U4.4 | length 3.6
  Top Layer w0.254: J3.3 64.5,12.5 64.77,12.77 U4.4
NetJ4_2: J4.2 U5.2 | length 3.6
  Top Layer w0.254: U5.2 101.23,12.77 101.5,12.5 J4.2
NetJ4_3: J4.3 U5.4 | length 3.6
  Top Layer w0.254: J4.3 103.5,12.5 103.77,12.77 U5.4
NetJ5_2: J5.2 U6.2 | length 3.6
  Top Layer w0.254: U6.2 116.73,12.77 117,12.5 J5.2
NetJ5_3: J5.3 U6.4 | length 3.6
  Top Layer w0.254: J5.3 119,12.5 119.27,12.77 U6.4
NetJ6_2: J6.2 U7.2 | length 3.6
  Top Layer w0.254: U7.2 132.23,12.77 132.5,12.5 J6.2
NetJ6_3: J6.3 U7.4 | length 3.6
  Top Layer w0.254: J6.3 134.5,12.5 134.77,12.77 U7.4
NetR1_1: R1.1 R40.2 | length 4
  Top Layer w0.254: R40.2 R1.1
NetR2_2: R2.2 U1.4 | length 7.2
  Top Layer w0.254: R2.2 36.95,54.5 37.725,53.725 U1.4
NetR3_2: R3.2 U1.14 | length 6.8
  Top Layer w0.254: U1.14 44.225,53.725 45,54.5 R3.2
NetR4_2: R4.2 U1.18 | length 11.9
  Top Layer w0.254: U1.18 42.275,65.275 44,67 R4.2
NetR5_2: R5.2 U1.17 | length 8.5
  Top Layer w0.254: U1.17 42.925,62.825 44.1,64 R5.2
NetR6_1: R6.1 R7.2 U1.21 | length 13.3
  Top Layer w0.254: R7.2 R6.1 U1.21
NetR10_2: R10.2 U2.6 | length 4.9
  Top Layer w0.254: R10.2 39.48,22.5 40.5,21.48 U2.6
NetR11_2: R11.2 U2.5 | length 4.7
  Top Layer w0.254: U2.5 41.77,21.79 42.48,22.5 R11.2
NetR13_2: R13.2 U3.6 | length 4.9
  Top Layer w0.254: R13.2 50.98,22.5 52,21.48 U3.6
NetR14_2: R14.2 U3.5 | length 4.7
  Top Layer w0.254: U3.5 53.27,21.79 53.98,22.5 R14.2
NetR16_2: R16.2 U4.6 | length 4.9
  Top Layer w0.254: R16.2 62.48,22.5 63.5,21.48 U4.6
NetR17_2: R17.2 U4.5 | length 4.7
  Top Layer w0.254: U4.5 64.77,21.79 65.48,22.5 R17.2
NetR19_2: R19.2 U5.6 | length 4.9
  Top Layer w0.254: R19.2 101.48,22.5 102.5,21.48 U5.6
NetR20_2: R20.2 U5.5 | length 4.7
  Top Layer w0.254: U5.5 103.77,21.79 104.48,22.5 R20.2
NetR22_2: R22.2 U6.6 | length 4.9
  Top Layer w0.254: R22.2 116.98,22.5 118,21.48 U6.6
NetR23_2: R23.2 U6.5 | length 4.7
  Top Layer w0.254: U6.5 119.27,21.79 119.98,22.5 R23.2
NetR25_2: R25.2 U7.6 | length 4.9
  Top Layer w0.254: R25.2 132.48,22.5 133.5,21.48 U7.6
NetR26_2: R26.2 U7.5 | length 4.7
  Top Layer w0.254: U7.5 134.77,21.79 135.48,22.5 R26.2
NetR27_2: R27.2 U8.4 | length 7.2
  Top Layer w0.254: R27.2 106.95,54.5 107.725,53.725 U8.4
NetR28_2: R28.2 U8.14 | length 6.8
  Top Layer w0.254: U8.14 114.225,53.725 115,54.5 R28.2
NetR29_2: R29.2 U8.18 | length 11.9
  Top Layer w0.254: U8.18 112.275,65.275 114,67 R29.2
NetR30_2: R30.2 U8.17 | length 8.5
  Top Layer w0.254: U8.17 112.925,62.825 114.1,64 R30.2
NetR31_2: R31.2 R32.1 U8.21 | length 13.3
  Top Layer w0.254: R31.2 R32.1 U8.21
PCM-CK: CN-B.35
PCM-DI: CN-B.34
PCM-DO: CN-B.33
PCM-SYNC: CN-B.36
SNS-BRAKE_CURR: CN-C.36
SNS-LUG-CURR: CN-C.37
SNS-MLL_CURR: CN-C.38
SNS-MLR_CURR: CN-C.35
UART-CB_RX: CN-A.22
UART-CB_TX: CN-A.21
US_EMG: CN-A.26
US_POWER: CN-A.32
USB_5V: CN-A.9 CN-A.10 | length 2.5
  Bottom Layer w0.5: CN-A.9 CN-A.10
USB_DM1: CN-A.11 pad.0@37.3,63.4 U1.25 | length 39.4
  Top Layer w0.254: pad.0@37.3,63.4 37.725,62.975 U1.25
  Bottom Layer w0.254: pad.0@37.3,63.4 37.3,69.8 38.8,71.3 61.04,71.3 CN-A.11
USB_DM2: CN-A.12 pad.0@66,71.6 pad.0@107,63.4 U8.25 | length 55.4
  Top Layer w0.254: CN-A.12 64.8,74.94 64.8,72.8 pad.0@66,71.6 ; pad.0@107,63.4 107.725,62.675 U8.25
  Bottom Layer w0.254: pad.0@66,71.6 87.5,71.6 95.7,63.4 pad.0@107,63.4
USB_DP1: CN-A.13 pad.0@36.3,62.6 U1.26 | length 52.3
  Top Layer w0.254: pad.0@36.3,62.6 37.075,61.825 U1.26
  Bottom Layer w0.254: pad.0@36.3,62.6 36.3,76.6 38.2,78.5 63.5,78.5 64.8,77.2 64.8,74.94 CN-A.13
USB_DP2: CN-A.14 pad.0@68.9,70.2 pad.0@106.2,62.5 U8.26 | length 52.2
  Top Layer w0.254: CN-A.14 67.3,74.98 67.3,71.8 pad.0@68.9,70.2 ; pad.0@106.2,62.5 107.075,61.625 U8.26
  Bottom Layer w0.254: pad.0@68.9,70.2 86.9,70.2 94.6,62.5 pad.0@106.2,62.5
USB_POWER: CN-A.30 DCR1.3 | length 39.8
  Top Layer w0.254: DCR1.3 77.2,46.62 77.2,69.1 78.1,70 84.7,70 85.1,70.4 85.1,75.04 CN-A.30
pads on no net: CN-A.15 CN-A.16 CN-A.23 CN-A.24 CN-A.27 CN-A.28 CN-A.34 CN-B.2 CN-B.4 CN-B.6 CN-B.20 CN-B.22 CN-B.24 CN-B.26 CN-B.27 CN-B.28 CN-B.29 CN-B.30 CN-B.31 CN-B.32 CN-B.37 CN-B.38 U1.15 U1.19 U1.20 U1.22 U8.15 U8.19 U8.20 U8.22

## Polygon pours and split planes (outlines as drawn)
GND on Top Layer "Top Layer-No Net" (solid, pour order 1001): 0.127,0.127 149.873,0.127 149.873,79.873 0.127,79.873
GND on Bottom Layer "Bottom Layer-No Net" (solid, pour order 1000): 0.127,0.127 149.873,0.127 149.873,79.873 0.127,79.873

## Silkscreen, mask and mechanical layers (free items; w line width, h text height)
Top Overlay:
  lines w0.254: 23.5,17.5 23.5,16.5 26,16.5 26,17.5 ; 23.5,25 23.5,26 ; 23.5,34 23.5,35 26,35 26,34 ; 25,2.73 25,1.5 26,1.5 ; 26,25 26,26 ; 42.5,1.5 43.5,1.5 43.5,2.73
  text "ICAN7006-B2" at 9,75.5 h2.8
  text "2018-03-25" at 113.5,75 h2.5
  text "REV. 00" at 121,71.5 h2.5
  text "USB/UART" at 11,71 h3
  text "USB" at 23,36 h2
  text "USB 1" at 13,1 h2
  text "USB 3 or UART 6" at 27.5,1 h2
  text "UART 1" at 49,1 h2
  text "UART 2" at 60.5,1 h2
  text "USB 2" at 84,1 h2
  text "UART 3" at 99.5,1 h2
  text "UART 4" at 115,1 h2
  text "UART 5" at 130.5,1 h2
Mechanical 13:
  the board outline again, w0.254

## Text inside footprints (layer, text, board x,y; h text height)
C2: Top Overlay "+" at 46.25,74.43 h1.52 r180
C3: Top Overlay "+" at 86.7,60 h1.52 r90
CN-A: Top Overlay "39" at 101.062,73.222 h1.27; Top Overlay "40" at 101.062,75.762 h1.27; Top Overlay "2" at 48.23,75.762 h1.27; Top Overlay "1" at 48.23,73.222 h1.27
CN-B: Top Overlay "39" at 146.778,66.162 h1.27 r90; Top Overlay "40" at 144.238,66.162 h1.27 r90; Top Overlay "2" at 144.238,13.33 h1.27 r90; Top Overlay "1" at 146.778,13.33 h1.27 r90
CN-C: Top Overlay "39" at 6.778,66.162 h1.27 r90; Top Overlay "40" at 4.238,66.162 h1.27 r90; Top Overlay "2" at 4.238,13.33 h1.27 r90; Top Overlay "1" at 6.778,13.33 h1.27 r90
J1: Top Overlay "1" at 34.1,10.5 h1.27
J2: Top Overlay "1" at 45.6,10.5 h1.27
J3: Top Overlay "1" at 57.1,10.5 h1.27
J4: Top Overlay "1" at 96.1,10.5 h1.27
J5: Top Overlay "1" at 111.6,10.5 h1.27
J6: Top Overlay "1" at 127.1,10.5 h1.27
J7: Top Overlay "1" at 9.1,10.5 h1.27
J8: Top Overlay "1" at 21.6,10.5 h1.27
J9: Top Overlay "1" at 80.1,10.5 h1.27